# Altium PCB 28pins_PCB.PcbDoc (part 2 of 3)
Units mm, origin at the board's own origin, x right, y up, seen from the top; angles counter-clockwise.
Board outline 68.58 x 53.34 mm, 2 copper layers (L1, L2), stack 1.671 mm thick; 105 components, 73 nets, 323 pads, 83 vias.
Unrouted connection lines stored in the file: 1.
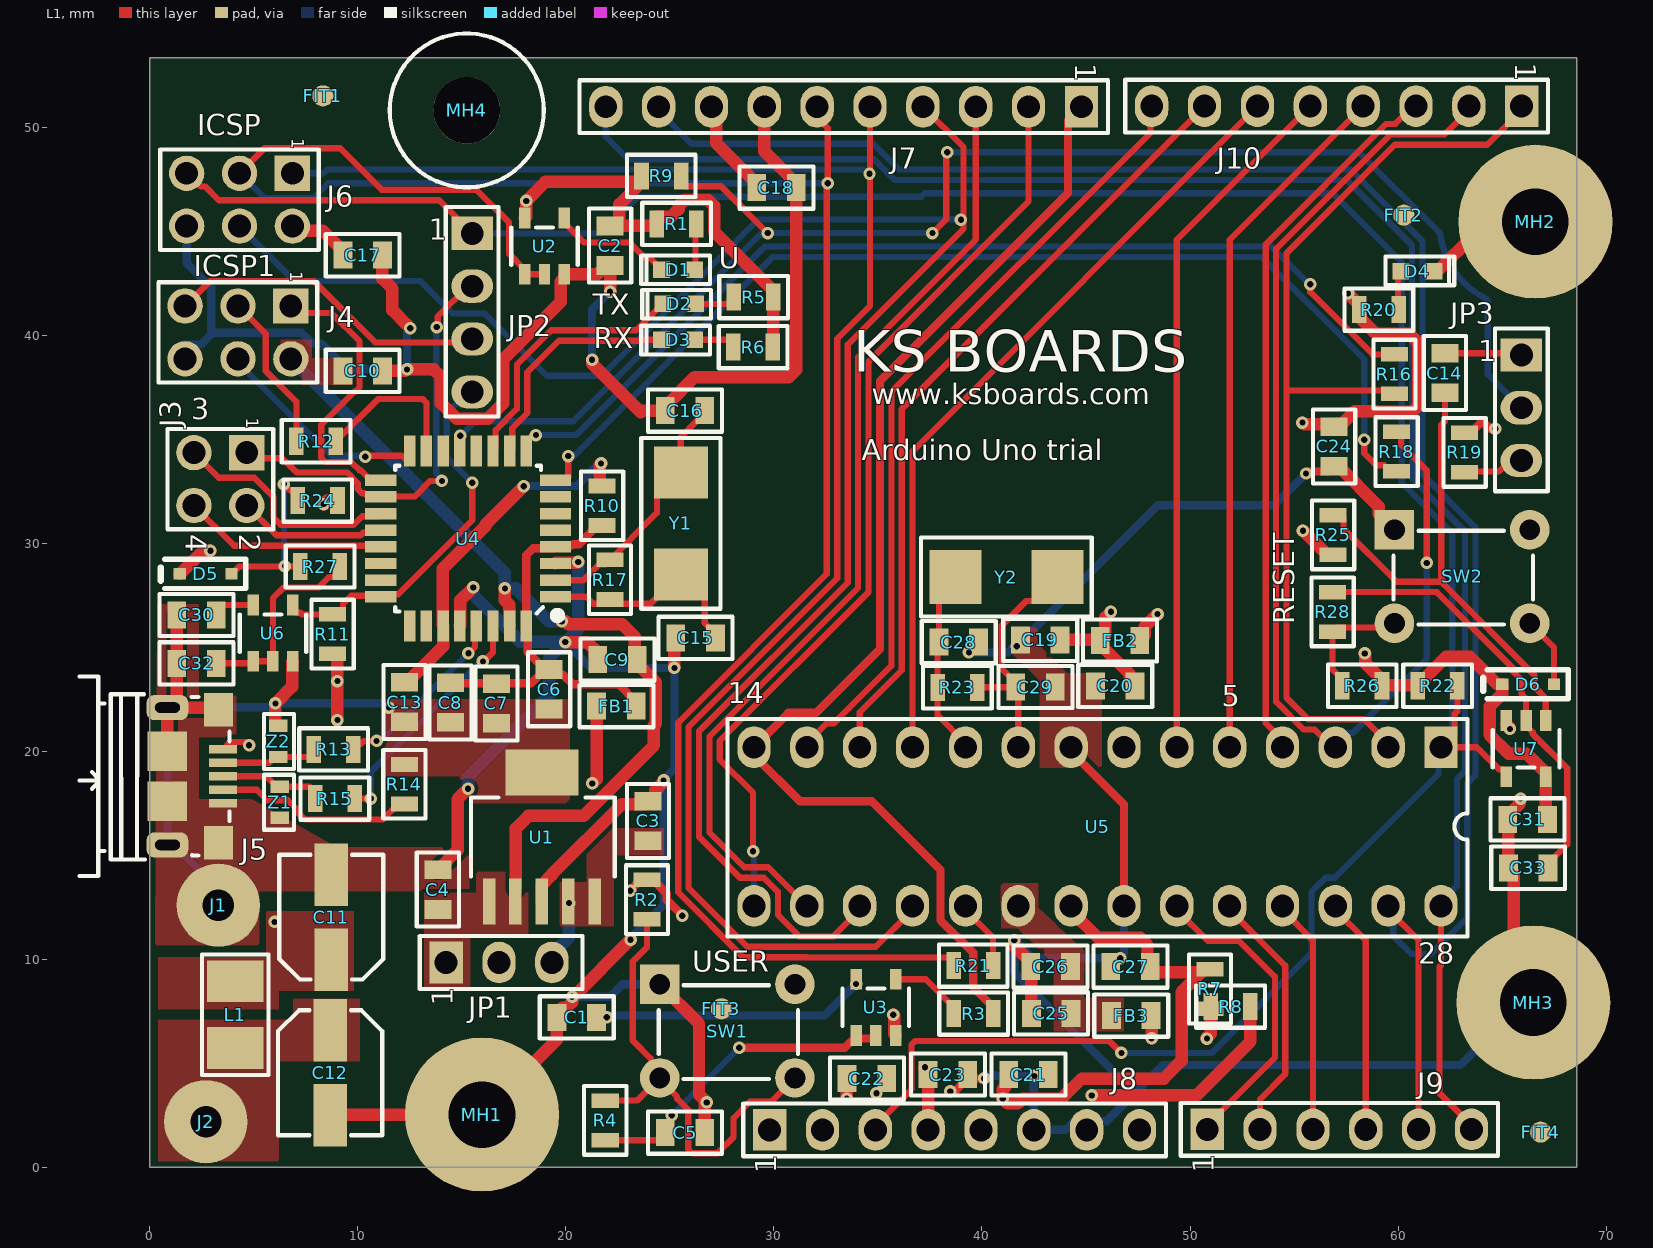
[diagram p0: L1 view]

## Part data (continued)
R2 R11 R22 R24 R25 R26: library part RC0805FR-0710KL, "RES SMD 10K OHM 1% 1/8W 0805", Case Code (Imperial)=0805, Case Code (Metric)=2012, Manufacturer=Yageo, Max Operating Temperature=155°C, Max Power Dissipation=125mW, Min Operating Temperature=-55°C, Package Quantity=1, Resistance=10kR, Resistor Type="Thick Film", Supplier Part Number 1=311-10.0KCRCT-ND, Temperature Coefficient=100ppm/°C, Tolerance=1%, Voltage Rating=150V, Case/Package=0805, Category="Chip SMD Resistors", ComponentLink1Description=https://datasheet.ciiva.com/11808/0900766b8106beab-11808151.pdf?src-supplier=RSComponents, ComponentLink1URL=https://datasheet.ciiva.com/11808/0900766b8106beab-11808151.pdf?src-supplier=RSComponents, ComponentLink2Description=https://datasheet.ciiva.com/12669/rc0805-12669688.pdf?src-supplier=Mouser, ComponentLink2URL=https://datasheet.ciiva.com/12669/rc0805-12669688.pdf?src-supplier=Mouser, ComponentLink3Description=https://datasheet.ciiva.com/46447/444164-46447563.pdf?src-supplier=Element14, ComponentLink3URL=https://datasheet.ciiva.com/46447/444164-46447563.pdf?src-supplier=Element14, ComponentLink4Description=https://datasheet.ciiva.com/2456/pyu-r-int-thick-7-2456972.pdf?src-supplier=Digi-Key, ComponentLink4URL=https://datasheet.ciiva.com/2456/pyu-r-int-thick-7-2456972.pdf?src-supplier=Digi-Key, ComponentLink5Description=https://datasheet.ciiva.com/2456/pyu-r-int-thick-7-2456973.pdf?src-supplier=Digi-Key, ComponentLink5URL=https://datasheet.ciiva.com/2456/pyu-r-int-thick-7-2456973.pdf?src-supplier=Digi-Key, ComponentLink6Description=https://datasheet.ciiva.com/2456/pyu-r-int-thick-7-2456974.pdf?src-supplier=Digi-Key, ComponentLink6URL=https://datasheet.ciiva.com/2456/pyu-r-int-thick-7-2456974.pdf?src-supplier=Digi-Key, ComponentLink7Description=https://datasheet.ciiva.com/16747/rc0805-16747087.pdf?src-supplier=Future+Electronics, ComponentLink7URL=https://datasheet.ciiva.com/16747/rc0805-16747087.pdf?src-supplier=Future+Electronics, Depth=1.25mm, Features="Moisture Resistant", Height=0.024inch, Lead Free="Lead Free", Length=2mm, Manufacturer Part Number=RC0805FR-0710KL, Military Standard=Not, Number of Terminations=2, Packaging="Tape and Reel", Power Rating=125mW, Pricing 1="1=0,10000, 10=0,03600, 100=0,01470, 1000=0,00660, 2500=0,00573 (USD)", REACH SVHC=Unknown, RoHS=Yes, Stock 1=16566844, Supplier 1=Digi-Key, Termination=SMD/SMT, Width=0.049inch
R4 R12 R13 R15 R21 R27 R28: library part RC0805FR-0722RL, "RES SMD 22 OHM 1% 1/8W 0805", Case Code (Imperial)=0805, Case Code (Metric)=2012, Manufacturer=Yageo, Max Operating Temperature=155°C, Max Power Dissipation=125mW, Min Operating Temperature=-55°C, Package Quantity=1, Resistor Type="Thick Film", Supplier Part Number 1=311-22.0CRCT-ND, Temperature Coefficient=100ppm/°C, Tolerance=1%, Voltage Rating=150V, Case/Package=0805, Category="Chip SMD Resistors", ComponentLink1Description=https://datasheet.ciiva.com/11819/0900766b8106beab-11819837.pdf?src-supplier=RSComponents, ComponentLink1URL=https://datasheet.ciiva.com/11819/0900766b8106beab-11819837.pdf?src-supplier=RSComponents, ComponentLink2Description=https://datasheet.ciiva.com/2457/pyu-r-int-thick-7-2457044.pdf?src-supplier=Digi-Key, ComponentLink2URL=https://datasheet.ciiva.com/2457/pyu-r-int-thick-7-2457044.pdf?src-supplier=Digi-Key, ComponentLink3Description=https://datasheet.ciiva.com/46447/444164-46447574.pdf?src-supplier=Element14, ComponentLink3URL=https://datasheet.ciiva.com/46447/444164-46447574.pdf?src-supplier=Element14, ComponentLink4Description=https://datasheet.ciiva.com/2457/pyu-r-int-thick-7-2457045.pdf?src-supplier=Digi-Key, ComponentLink4URL=https://datasheet.ciiva.com/2457/pyu-r-int-thick-7-2457045.pdf?src-supplier=Digi-Key, ComponentLink5Description=https://datasheet.ciiva.com/2457/pyu-r-int-thick-7-2457046.pdf?src-supplier=Digi-Key, ComponentLink5URL=https://datasheet.ciiva.com/2457/pyu-r-int-thick-7-2457046.pdf?src-supplier=Digi-Key, ComponentLink6Description=https://datasheet.ciiva.com/12667/rc0805-12667371.pdf?src-supplier=Mouser, ComponentLink6URL=https://datasheet.ciiva.com/12667/rc0805-12667371.pdf?src-supplier=Mouser, Depth=1.25mm, Features="Moisture Resistant", Height=0.024inch, Lead Free="Lead Free", Length=0.079inch, Manufacturer Part Number=RC0805FR-0722RL, Military Standard=Not, Number of Terminations=2, Packaging="Tape and Reel", Power Rating=125mW, Pricing 1="1=0,10000, 10=0,03600, 100=0,01470, 1000=0,00660, 2500=0,00573 (USD)", REACH SVHC=Unknown, Resistance=22R, RoHS=Yes, Stock 1=471246, Supplier 1=Digi-Key, Termination=SMD/SMT, Width=0.049inch, Working Voltage=150V
R7 R8 R10 R14: library part RC0805JR-070RL, "Surface Mount Thick Film Resistor, RC Series, 125 mW, - 5%, 150 V, 0805 [2012 Metric]", Case Code (Imperial)=0805, Case Code (Metric)=2012, Manufacturer=Yageo, Max Operating Temperature=155°C, Min Operating Temperature=-55°C, Power Rating=125mW, Resistance=0mR, Resistor Type="Thick Film", Supplier Part Number 1=311-0.0ARCT-ND, Temperature Coefficient=200ppm/°C, Tolerance=5%, Voltage Rating=150V, Case/Package=0805, Category="Chip SMD Resistors", ComponentLink1Description=https://datasheet.ciiva.com/7941/1738694-7941861.pdf?src-supplier=Element14, ComponentLink1URL=https://datasheet.ciiva.com/7941/1738694-7941861.pdf?src-supplier=Element14, ComponentLink2Description=https://datasheet.ciiva.com/11819/0900766b8106beab-11819430.pdf?src-supplier=RSComponents, ComponentLink2URL=https://datasheet.ciiva.com/11819/0900766b8106beab-11819430.pdf?src-supplier=RSComponents, ComponentLink3Description=https://datasheet.ciiva.com/7941/1738694-7941862.pdf?src-supplier=Element14, ComponentLink3URL=https://datasheet.ciiva.com/7941/1738694-7941862.pdf?src-supplier=Element14, ComponentLink4Description=https://datasheet.ciiva.com/7941/1738694-7941863.pdf?src-supplier=Element14, ComponentLink4URL=https://datasheet.ciiva.com/7941/1738694-7941863.pdf?src-supplier=Element14, ComponentLink5Description=https://datasheet.ciiva.com/15190/getdatasheetpartid-330685-15190028.pdf?src-supplier=Verical, ComponentLink5URL=https://datasheet.ciiva.com/15190/getdatasheetpartid-330685-15190028.pdf?src-supplier=Verical, Contact Plating=Tin,Matte, Depth=1.25mm, Height=0.5mm, Lead Free="Lead Free", Length=2mm, Manufacturer Part Number=RC0805JR-070RL, Military Standard=Not, Number of Pins=2, Packaging="Tape and Reel", Pricing 1="1=0,10000, 10=0,03100, 25=0,02240, 50=0,01720, 100=0,01260, 250=0,00964, 500=0,00770, 1000=0,00567 (USD)", Radiation Hardening=No, REACH SVHC=Unknown, RoHS=Yes, Stock 1=4474861, Supplier 1=Digi-Key, Termination=SMD/SMT, Voltage Rating (DC)=150V, Width=1.25mm
R9: library part RC0805FR-07100KL, "YAGEO         RC0805FR-07100KL            RES, THICK FILM, 100K, 1%, 0.125W, 0805, REEL", Case Code (Imperial)=0805, Case Code (Metric)=2012, Manufacturer=Yageo, Max Operating Temperature=155°C, Max Power Dissipation=125mW, Min Operating Temperature=-55°C, Package Quantity=1, Resistance=100kR, Resistor Type="Thick Film", Supplier Part Number 1=311-100KCRCT-ND, Temperature Coefficient=100ppm/°C, Tolerance=1%, Voltage Rating=150V, Case/Package=0805, Category="Chip SMD Resistors", ComponentLink1Description=https://datasheet.ciiva.com/11808/0900766b8106beab-11808858.pdf?src-supplier=RSComponents, ComponentLink1URL=https://datasheet.ciiva.com/11808/0900766b8106beab-11808858.pdf?src-supplier=RSComponents, ComponentLink2Description=https://datasheet.ciiva.com/2457/pyu-r-int-thick-7-2457017.pdf?src-supplier=Digi-Key, ComponentLink2URL=https://datasheet.ciiva.com/2457/pyu-r-int-thick-7-2457017.pdf?src-supplier=Digi-Key, ComponentLink3Description=https://datasheet.ciiva.com/12667/rc0805-12667001.pdf?src-supplier=Mouser, ComponentLink3URL=https://datasheet.ciiva.com/12667/rc0805-12667001.pdf?src-supplier=Mouser, ComponentLink4Description=https://datasheet.ciiva.com/2457/pyu-r-int-thick-7-2457018.pdf?src-supplier=Digi-Key, ComponentLink4URL=https://datasheet.ciiva.com/2457/pyu-r-int-thick-7-2457018.pdf?src-supplier=Digi-Key, ComponentLink5Description=https://datasheet.ciiva.com/16747/rc0805-16747226.pdf?src-supplier=Future+Electronics, ComponentLink5URL=https://datasheet.ciiva.com/16747/rc0805-16747226.pdf?src-supplier=Future+Electronics, ComponentLink6Description=https://datasheet.ciiva.com/7941/1697719-7941678.pdf?src-supplier=Element14, ComponentLink6URL=https://datasheet.ciiva.com/7941/1697719-7941678.pdf?src-supplier=Element14, ComponentLink7Description=https://datasheet.ciiva.com/22747/444164-22747534.pdf?src-supplier=Element14, ComponentLink7URL=https://datasheet.ciiva.com/22747/444164-22747534.pdf?src-supplier=Element14, ComponentLink8Description=https://datasheet.ciiva.com/2457/pyu-r-int-thick-7-2457019.pdf?src-supplier=Digi-Key, ComponentLink8URL=https://datasheet.ciiva.com/2457/pyu-r-int-thick-7-2457019.pdf?src-supplier=Digi-Key, ComponentLink9Description=https://datasheet.ciiva.com/7660/38627-7660796.pdf?src-supplier=Element14, ComponentLink9URL=https://datasheet.ciiva.com/7660/38627-7660796.pdf?src-supplier=Element14, ComponentLink10Description=https://datasheet.ciiva.com/7941/1697719-7941676.pdf?src-supplier=Element14, ComponentLink10URL=https://datasheet.ciiva.com/7941/1697719-7941676.pdf?src-supplier=Element14, ComponentLink11Description=https://datasheet.ciiva.com/7941/1686128-7941677.pdf?src-supplier=Element14, ComponentLink11URL=https://datasheet.ciiva.com/7941/1686128-7941677.pdf?src-supplier=Element14, Depth=1.25mm, Features="Moisture Resistant", Height=0.024inch, Lead Free="Lead Free", Lead Pitch=0.4mm, Length=2mm, Manufacturer Part Number=RC0805FR-07100KL, Military Standard=Not, Number of Pins=2, Number of Terminations=2, Packaging="Tape and Reel", Power Rating=125mW, Pricing 1="1=0,10000, 10=0,03600, 100=0,01470, 1000=0,00660, 2500=0,00573 (USD)", REACH SVHC=Unknown, RoHS=Yes, Stock 1=2509974, Supplier 1=Digi-Key, Termination=SMD/SMT, Voltage Rating (DC)=150V, Width=0.049inch
R16 R18 R19: library part RC0805FR-071KL, "RESISTOR, 0805 1K 1%, FULL REEL; Product Range:YAGEO - RC Series; Resistance:1kohm; Power Rating:125mW; Resistance Tolerance:± 1%; Resistor Case Style:0805 [2012 Metric]; Resistor Element Material:Thick Film; Temperature Coefficient:± 250ppm/°C; Voltage Rating:150V; Packaging:Tape & Reel; MSL:-; SVHC:No SVHC (16-Dec-2013); External Depth:0.55mm; External Length / Height:2mm; External Width:1.25mm; No. of Pins:2; Operating Temperature Max:155°C; Operating Temperature Min:-55°C; Operating Temperature Range:-55°C to +155°C; Reel Quantity:5000; Resistor Mounting:SMD; Series:RC12H; Temperature Coef", Case Code (Imperial)=0805, Case Code (Metric)=2012, Manufacturer=Yageo, Max Operating Temperature=155°C, Max Power Dissipation=125mW, Min Operating Temperature=-55°C, Package Quantity=1, Resistance=1kR, Resistor Type="Thick Film", Supplier Part Number 1=311-1.00KCRCT-ND, Temperature Coefficient=100ppm/°C, Tolerance=1%, Voltage Rating=150V, Case/Package=0805, Category="Chip SMD Resistors", Depth=1.25mm, Features="Moisture Resistant", Height=0.024inch, Lead Free="Lead Free", Length=0.079inch, Manufacturer Part Number=RC0805FR-071KL, Military Standard=Not, Number of Pins=2, Number of Terminations=2, Packaging="Tape and Reel", Power Rating=125mW, Pricing 1="1=0,10000, 10=0,03600, 100=0,01470, 1000=0,00660, 2500=0,00573 (USD)", REACH SVHC=Unknown, RoHS=Yes, Stock 1=15292082, Supplier 1=Digi-Key, Termination=SMD/SMT, Voltage Rating (DC)=150V, Width=0.049inch
R17 R23: library part RC0805FR-071ML, "RES SMD 1M OHM 1% 1/8W 0805", Case Code (Imperial)=0805, Case Code (Metric)=2012, Manufacturer=Yageo, Max Operating Temperature=155°C, Max Power Dissipation=125mW, Min Operating Temperature=-55°C, Package Quantity=1, Resistance=1MR, Resistor Type="Thick Film", Supplier Part Number 1=311-1.00MCRCT-ND, Temperature Coefficient=100ppm/°C, Tolerance=1%, Voltage Rating=150V, Case/Package=0805, Category="Chip SMD Resistors", ComponentLink1Description=https://datasheet.ciiva.com/2519/pyu-r-int-thick-7-2519712.pdf?src-supplier=Digi-Key, ComponentLink1URL=https://datasheet.ciiva.com/2519/pyu-r-int-thick-7-2519712.pdf?src-supplier=Digi-Key, ComponentLink2Description=https://datasheet.ciiva.com/12666/rc0805-12666975.pdf?src-supplier=Mouser, ComponentLink2URL=https://datasheet.ciiva.com/12666/rc0805-12666975.pdf?src-supplier=Mouser, ComponentLink3Description=https://datasheet.ciiva.com/2519/pyu-r-int-thick-7-2519713.pdf?src-supplier=Digi-Key, ComponentLink3URL=https://datasheet.ciiva.com/2519/pyu-r-int-thick-7-2519713.pdf?src-supplier=Digi-Key, ComponentLink4Description=https://datasheet.ciiva.com/2519/pyu-r-int-thick-7-2519711.pdf?src-supplier=Digi-Key, ComponentLink4URL=https://datasheet.ciiva.com/2519/pyu-r-int-thick-7-2519711.pdf?src-supplier=Digi-Key, ComponentLink5Description=https://datasheet.ciiva.com/17419/rc0805-17419909.pdf?src-supplier=Future+Electronics, ComponentLink5URL=https://datasheet.ciiva.com/17419/rc0805-17419909.pdf?src-supplier=Future+Electronics, Depth=1.25mm, Features="Moisture Resistant", Height=0.024inch, Lead Free="Lead Free", Length=0.079inch, Manufacturer Part Number=RC0805FR-071ML, Military Standard=Not, Number of Terminations=2, Packaging="Tape and Reel", Power Rating=125mW, Pricing 1="1=0,100000, 10=0,036000, 100=0,014800, 1000=0,006650, 2500=0,005770 (USD)", REACH SVHC=Unknown, RoHS=Yes, Stock 1=2768308, Supplier 1=Digi-Key, Termination=SMD/SMT, Width=0.049inch
SW1 SW2: "SWITCH TACTILE SPST-NO 0.05A 24V", Contact Current Rating=50mA, Contact Resistance=100mR, Manufacturer="TE Connectivity Alcoswitch", Max Operating Temperature=85°C, Max Voltage Rating (DC)=24V, Min Operating Temperature=-35°C, Operating Force=160gf, Package Quantity=750, Supplier Part Number 1=450-1650-ND, Actuator Length=0.055inch, Actuator Material=PBT, Actuator Type=Standard, Category="Pushbutton Switches", ComponentLink1Description=https://datasheet.ciiva.com/30199/1825910-6rqpn1825910-6-30199520.pdf?src-supplier=Onlinecomponents.com, ComponentLink1URL=https://datasheet.ciiva.com/30199/1825910-6rqpn1825910-6-30199520.pdf?src-supplier=Onlinecomponents.com, ComponentLink2Description=https://datasheet.ciiva.com/15184/getdatasheetpartid-395915-15184509.pdf?src-supplier=Verical, ComponentLink2URL=https://datasheet.ciiva.com/15184/getdatasheetpartid-395915-15184509.pdf?src-supplier=Verical, Contact Material="Copper Alloy", Contact Plating=Silver, Electrical Life=100000Cycles, ELV=Compliant, Illumination Type=Non-Illuminated,Illuminated, Lead Free="Lead Free", Length=5.99mm, Manufacturer Part Number=1825910-6, Max Current Rating=50mA, Mechanical Life=100000Cycles, Mount="Through Hole", Orientation=Straight, Packaging="Loose Piece", Pricing 1="1=0,10000, 10=0,10100, 25=0,09560, 100=0,08700, 250=0,08180, 500=0,07484, 1000=0,06265, 5000=0,05743, 10000=0,05395 (USD)", REACH SVHC=Unknown, RoHS=Yes, Stock 1=151652, Supplier 1=Digi-Key, Switch Function=Off-Mom, Switch Travel=0.25mm, Termination="PC Pins", Throw Configuration=SPST, Type=Switch
U1: "IC REG LINEAR 3.3V 1.5A SOT223-6", Case/Package=SOT-223, Dropout Voltage=340mV, Input Bias Current=1mA, Manufacturer="Texas Instruments", Max Input Voltage=20V, Max Operating Temperature=125°C, Max Output Current=1.5A, Max Output Voltage=3.3V, Min Current Limit=1.6A, Min Input Voltage=2.1V, Min Operating Temperature=-40°C, Package Quantity=1, Supplier Part Number 1=296-24534-1-ND, Accuracy=3%, Category="Voltage Regulators - Linear", ComponentLink1Description=https://datasheet.ciiva.com/2046/tl1963a-2046161.pdf?src-supplier=Digi-Key, ComponentLink1URL=https://datasheet.ciiva.com/2046/tl1963a-2046161.pdf?src-supplier=Digi-Key, ComponentLink2Description=https://datasheet.ciiva.com/2046/tl1963a-2046162.pdf?src-supplier=Digi-Key, ComponentLink2URL=https://datasheet.ciiva.com/2046/tl1963a-2046162.pdf?src-supplier=Digi-Key, ComponentLink3Description=https://datasheet.ciiva.com/2046/tl1963a-2046163.pdf?src-supplier=Digi-Key, ComponentLink3URL=https://datasheet.ciiva.com/2046/tl1963a-2046163.pdf?src-supplier=Digi-Key, ComponentLink4Description=https://datasheet.ciiva.com/26176/tl1963a-25-26176569.pdf?src-supplier=Avnet+Europe, ComponentLink4URL=https://datasheet.ciiva.com/26176/tl1963a-25-26176569.pdf?src-supplier=Avnet+Europe, Contact Plating=Gold, Lead Free="Lead Free", Manufacturer Part Number=TL1963A-33DCQR, Min Output Voltage=3.3V, Number of Outputs=1, Number of Pins=6, Number of Regulators=1, Output Current=1.5A, Output Type=Fixed, Output Voltage=3.3V, Packaging="Tape and Reel", Polarity=Positive, Pricing 1="1=2,80000, 10=2,51300, 25=2,37600, 100=1,95360, 250=1,75296, 500=1,68960, 1000=1,40448 (USD)", Quiescent Current=1mA, Radiation Hardening=No, RoHS=Yes, Stock 1=1766, Supplier 1=Digi-Key
U2 U3 U6 U7: "TEXAS INSTRUMENTS - SN74AHC1G09DBVR - AND Gate, 74AHC1G09, 2 Input, 2 V to 5.5 V, SOT-23-5", Case/Package=SOT-23, Low Level Output Current=8mA, Manufacturer="Texas Instruments", Max Operating Temperature=125°C, Max Supply Voltage=5.5V, Min Operating Temperature=-55°C, Min Supply Voltage=2V, Output Current=25mA, Package Quantity=3000, Quiescent Current=1uA, Supplier Part Number 1=296-29202-1-ND, Category="Logic Gates", ComponentLink1Description=https://datasheet.ciiva.com/1864/sn74ahc1g09-1864410.pdf?src-supplier=Digi-Key, ComponentLink1URL=https://datasheet.ciiva.com/1864/sn74ahc1g09-1864410.pdf?src-supplier=Digi-Key, ComponentLink2Description=https://datasheet.ciiva.com/1864/sn74ahc1g09-1864411.pdf?src-supplier=Digi-Key, ComponentLink2URL=https://datasheet.ciiva.com/1864/sn74ahc1g09-1864411.pdf?src-supplier=Digi-Key, ComponentLink3Description=https://datasheet.ciiva.com/1864/sn74ahc1g09-1864412.pdf?src-supplier=Digi-Key, ComponentLink3URL=https://datasheet.ciiva.com/1864/sn74ahc1g09-1864412.pdf?src-supplier=Digi-Key, Contact Plating=Tin,Matte, Lead Free="Lead Free", Logic Function="AND GATE", Manufacturer Part Number=SN74AHC1G09DBVR, Mount="Surface Mount", Number of Bits=1, Number of Circuits=1, Number of Elements=1, Number of Gates=1, Number of Inputs=2, Number of Outputs=1, Number of Pins=5, Output Voltage=5.5V, Packaging="Tape and Reel", Pricing 1="1=0,32000, 10=0,24000, 25=0,21000, 100=0,13590, 250=0,11252, 500=0,09000, 1000=0,06900 (USD)", Propagation Delay=7.5ns, Radiation Hardening=No, REACH SVHC="No SVHC", RoHS=Yes, Stock 1=19058, Supplier 1=Digi-Key
U4: "MICROCHIP - ATMEGA16U2-AU - MCU, 8BIT, MEGAAVR, 16MHZ, TQFP-32", Case/Package=A, Frequency=16MHz, Manufacturer="Microchip / Atmel", Max Operating Temperature=85°C, Max Supply Voltage=5.5V, Min Operating Temperature=-40°C, Min Supply Voltage=2.7V, Package Quantity=1250, Supplier Part Number 1=ATMEGA16U2-AU-ND, Category=Microcontrollers, ComponentLink1Description=https://datasheet.ciiva.com/13036/doc7799-28769-13036800.pdf?src-supplier=Mouser, ComponentLink1URL=https://datasheet.ciiva.com/13036/doc7799-28769-13036800.pdf?src-supplier=Mouser, ComponentLink2Description=https://datasheet.ciiva.com/22651/doc7799-22651110.pdf?src-supplier=Farnell, ComponentLink2URL=https://datasheet.ciiva.com/22651/doc7799-22651110.pdf?src-supplier=Farnell, Contact Plating=Tin,Matte, Core Architecture=AVR, Data Bus Width=8b, Height=1.05mm, Interface=SPI,UART,USB,USART,Serial, Lead Free="Lead Free", Length=7mm, Manufacturer Part Number=ATMEGA16U2-AU, Max Frequency=16MHz, Memory Size=16KB, Memory Type=FLASH, Mount="Surface Mount", Number of I/Os=22, Number of Pins=32, Number of Programmable I/O=22, Number of PWM Channels=5, Number of SPI Channels=1, Number of Timers/Counters=2, Oscillator Type=Internal, Packaging=Tray, Peripherals="Brown-out Detect/Reset,POR,PWM,WDT", Pricing 1="1=2,45000, 25=2,25000, 100=2,04000 (USD)", RAM Size=512B, REACH SVHC="No SVHC", RoHS=Yes, Stock 1=3559, Supplier 1=Digi-Key, Watchdog Timer=Yes, Width=7mm
U5: "ATMEGA328P-PU; 8 bit Microcontroller AVR 20MHz 1; 32kb Flash; 2kb RAM; I2C SPI 2", Case/Package=PDIP, Frequency=20MHz, Manufacturer="Microchip / Atmel", Max Operating Temperature=85°C, Max Supply Voltage=5.5V, Min Operating Temperature=-40°C, Min Supply Voltage=1.8V, Package Quantity=14, Supplier Part Number 1=ATMEGA328P-PU-ND, Category=Microcontrollers, ComponentLink1Description=https://datasheet.ciiva.com/1157/1684409-1157696.pdf?src-supplier=Element14, ComponentLink1URL=https://datasheet.ciiva.com/1157/1684409-1157696.pdf?src-supplier=Element14, ComponentLink2Description=https://datasheet.ciiva.com/20168/73-4283-20168380.pdf?src-supplier=Rapid+Electronics, ComponentLink2URL=https://datasheet.ciiva.com/20168/73-4283-20168380.pdf?src-supplier=Rapid+Electronics, ComponentLink3Description=https://datasheet.ciiva.com/19457/2139111-19457070.pdf?src-supplier=Jameco, ComponentLink3URL=https://datasheet.ciiva.com/19457/2139111-19457070.pdf?src-supplier=Jameco, ComponentLink4Description=https://datasheet.ciiva.com/26818/atmega328p-pu-26818578.pdf?src-supplier=IIIC, ComponentLink4URL=https://datasheet.ciiva.com/26818/atmega328p-pu-26818578.pdf?src-supplier=IIIC, ComponentLink5Description=https://datasheet.ciiva.com/29119/155197-da-01-en-microcontr-atmega328p-pu-8bit-pdip-28-29119593.pdf?src-supplier=Conrad, ComponentLink5URL=https://datasheet.ciiva.com/29119/155197-da-01-en-microcontr-atmega328p-pu-8bit-pdip-28-29119593.pdf?src-supplier=Conrad, ComponentLink6Description=https://datasheet.ciiva.com/15213/getdatasheetpartid-318533-15213133.pdf?src-supplier=Verical, ComponentLink6URL=https://datasheet.ciiva.com/15213/getdatasheetpartid-318533-15213133.pdf?src-supplier=Verical, Contact Plating=Tin,Matte, Core Architecture=AVR, Data Bus Width=8b, Height=3.28mm, Interface=I2C,SPI,UART,USART,2-Wire, Lead Free="Lead Free", Length=37.4mm, Manufacturer Part Number=ATMEGA328P-PU, Max Frequency=20MHz, Memory Size=32KB, Memory Type=FLASH, Mount="Through Hole", Number of ADC Channels=6, Number of I2C Channels=1, Number of I/Os=23, Number of Pins=28, Number of Programmable I/O=23, Number of PWM Channels=6, Number of SPI Channels=1, Number of Timers/Counters=3, Oscillator Type=Internal, Packaging=Rail/Tube, Peripherals="Brown-out Detect/Reset,POR,PWM,WDT", Pricing 1="1=2,08000, 25=1,91000, 100=1,73000 (USD)", Radiation Hardening=No, RAM Size=2KB, REACH SVHC="No SVHC", RoHS=Yes, Stock 1=7026, Supplier 1=Digi-Key, Watchdog Timer=Yes, Width=6.76mm
Y1 Y2: "CRYSTAL 16.0000MHZ 18PF SMD", Case/Package=CSMD, ESR (Equivalent Series Resistance)=50R, Frequency=16MHz, Frequency Stability=30ppm, Frequency Tolerance=20ppm, Load Capacitance=18pF, Manufacturer=Abracon, Max Operating Temperature=85°C, Min Operating Temperature=-40°C, Package Quantity=1000, Resistor Type=Ceramic, Supplier Part Number 1=535-9840-1-ND, Category=Crystals, ComponentLink1Description=https://datasheet.ciiva.com/15116/getdatasheetpartid-721624-15116835.pdf?src-supplier=Verical, ComponentLink1URL=https://datasheet.ciiva.com/15116/getdatasheetpartid-721624-15116835.pdf?src-supplier=Verical, ComponentLink2Description=https://datasheet.ciiva.com/22658/947971-22658293.pdf?src-supplier=Element14, ComponentLink2URL=https://datasheet.ciiva.com/22658/947971-22658293.pdf?src-supplier=Element14, ComponentLink3Description=https://datasheet.ciiva.com/5788/abm7-5788054.pdf?src-supplier=Farnell, ComponentLink3URL=https://datasheet.ciiva.com/5788/abm7-5788054.pdf?src-supplier=Farnell, ComponentLink4Description=https://datasheet.ciiva.com/7998/947971-7998600.pdf?src-supplier=Element14, ComponentLink4URL=https://datasheet.ciiva.com/7998/947971-7998600.pdf?src-supplier=Element14, ComponentLink5Description=https://datasheet.ciiva.com/46385/947971-46385243.pdf?src-supplier=Element14, ComponentLink5URL=https://datasheet.ciiva.com/46385/947971-46385243.pdf?src-supplier=Element14, ComponentLink6Description=https://datasheet.ciiva.com/16383/abm7-16383174.pdf?src-supplier=Future+Electronics, ComponentLink6URL=https://datasheet.ciiva.com/16383/abm7-16383174.pdf?src-supplier=Future+Electronics, ComponentLink7Description=https://datasheet.ciiva.com/18649/abm7-18649865.pdf?src-supplier=Digi-Key, ComponentLink7URL=https://datasheet.ciiva.com/18649/abm7-18649865.pdf?src-supplier=Digi-Key, ComponentLink8Description=https://datasheet.ciiva.com/18649/abm7-18649866.pdf?src-supplier=Digi-Key, ComponentLink8URL=https://datasheet.ciiva.com/18649/abm7-18649866.pdf?src-supplier=Digi-Key, ComponentLink9Description=https://datasheet.ciiva.com/18649/abm7-18649867.pdf?src-supplier=Digi-Key, ComponentLink9URL=https://datasheet.ciiva.com/18649/abm7-18649867.pdf?src-supplier=Digi-Key, ComponentLink10Description=https://datasheet.ciiva.com/26941/getdatasheetpartid-719818-26941724.pdf?src-supplier=Verical, ComponentLink10URL=https://datasheet.ciiva.com/26941/getdatasheetpartid-719818-26941724.pdf?src-supplier=Verical, Depth=3.5mm, Height=0.055inch, Lead Free="Lead Free", Length=6mm, Manufacturer Part Number=ABM7-16.000MHZ-D2Y-T, Mount="Surface Mount", Number of Pins=2, Packaging="Tape and Reel", Pricing 1="1=0,87000, 10=0,77300, 50=0,72240, 100=0,63840, 500=0,60480 (USD)", Radiation Hardening=No, REACH SVHC=Unknown, RoHS=Yes, Stock 1=57628, Supplier 1=Digi-Key, Termination=SMD/SMT, Tolerance=20ppm, Width=3.3mm
Z1 Z2: "VARISTOR 0603", Capacitance=0.5pF, Case Code (Imperial)=0603, Case Code (Metric)=1608, Clamping Voltage=20V, Current Rating=50nA, Manufacturer=Bourns, Max Operating Temperature=85°C, Max Voltage Rating (DC)=5V, Min Operating Temperature=-40°C, Package Quantity=1, Supplier Part Number 1=CG0603MLC-05ECT-ND, Voltage Rating (AC)=8V, Case/Package=0603, Category=Varistors, ComponentLink1Description=https://datasheet.ciiva.com/27747/1163231-27747629.pdf?src-supplier=Jameco, ComponentLink1URL=https://datasheet.ciiva.com/27747/1163231-27747629.pdf?src-supplier=Jameco, ComponentLink2Description=https://datasheet.ciiva.com/30070/mlc-30070503.pdf?src-supplier=Onlinecomponents.com, ComponentLink2URL=https://datasheet.ciiva.com/30070/mlc-30070503.pdf?src-supplier=Onlinecomponents.com, ComponentLink3Description=https://datasheet.ciiva.com/6991/mlc-6991832.pdf?src-supplier=Digi-Key, ComponentLink3URL=https://datasheet.ciiva.com/6991/mlc-6991832.pdf?src-supplier=Digi-Key, ComponentLink4Description=https://datasheet.ciiva.com/6991/mlc-6991834.pdf?src-supplier=Digi-Key, ComponentLink4URL=https://datasheet.ciiva.com/6991/mlc-6991834.pdf?src-supplier=Digi-Key, ComponentLink5Description=https://datasheet.ciiva.com/6991/mlc-6991836.pdf?src-supplier=Digi-Key, ComponentLink5URL=https://datasheet.ciiva.com/6991/mlc-6991836.pdf?src-supplier=Digi-Key, ComponentLink6Description=https://datasheet.ciiva.com/1278/1785244-1278701.pdf?src-supplier=Element14, ComponentLink6URL=https://datasheet.ciiva.com/1278/1785244-1278701.pdf?src-supplier=Element14, ComponentLink7Description=https://datasheet.ciiva.com/22696/1785244-22696318.pdf?src-supplier=Element14, ComponentLink7URL=https://datasheet.ciiva.com/22696/1785244-22696318.pdf?src-supplier=Element14, ComponentLink8Description=https://datasheet.ciiva.com/25958/mlc-25958222.pdf?src-supplier=Avnet+Europe, ComponentLink8URL=https://datasheet.ciiva.com/25958/mlc-25958222.pdf?src-supplier=Avnet+Europe, ComponentLink9Description=https://datasheet.ciiva.com/8084/mlc-8084047.pdf?src-supplier=Avnet, ComponentLink9URL=https://datasheet.ciiva.com/8084/mlc-8084047.pdf?src-supplier=Avnet, Contact Plating=Tin, Depth=0.8mm, Element Configuration=Single, Leakage Current=50nA, Length=1.6mm, Manufacturer Part Number=CG0603MLC-05E, Number of Channels=1, Number of Circuits=1, Number of Pins=2, Operating Supply Voltage=5V, Packaging="Tape and Reel", Pricing 1="1=0,49000, 10=0,34800, 25=0,28600, 100=0,22880, 250=0,16640, 500=0,13520, 1000=0,10400, 2500=0,09360 (USD)", Radiation Hardening=No, REACH SVHC="No SVHC", RoHS=Yes, Stock 1=117918, Supplier 1=Digi-Key, Termination=SMD/SMT, Thickness=0.8mm, Turn-On Delay Time=1ns, Voltage=5V, Voltage Rating (DC)=5V, Width=0.8mm, Working Voltage=5V

## Via types
v1: diameter 0.6, hole 0.3, L1 to L2, 83 vias

## Nets (pads, with @x,y where several pads share a name; then routed paths per layer and width w, separated by ;. In a path a pad name is that pad's centre, name@x,y a point inside that pad or via, vN(x,y) a via of type N, cw(c..) or ccw(c..) an arc to the next point about the centre after c; other vN are vias at no path point)
5V_USB: C11.1 J5.1 L1.1 | length 1.5
  L1 w0.3: J5.1@3.53,20.1 3.88,20.45 4.62,20.45 v1(4.775,20.295)
  other v1: 6,11.8
16U2_16MHz_XTAL1: C15.2 R17.2 U4.1 Y1.2 | length 10.5
  L1 w0.3: U4.1@19.5,27.425 20.982,27.425 21.315,27.092 21.615,27.092 24.07,27.092 25.477,28.499 Y1.2@25.527,28.499 25.577,28.499 26.677,27.399 26.677,26.162 27.188,25.651 C15.2@27.188,25.451
16U2_16MHz_XTAL2: C16.2 R17.1 U4.2 Y1.1 | length 12.2
  L1 w0.3: U4.2@19.5,28.225 20.849,28.225 21.615,28.992 21.915,28.992 24.377,31.453 24.377,32.299 25.477,33.399 Y1.1@25.527,33.399 25.527,35.099 26.301,35.873 26.38,35.873 26.68,36.173 C16.2@26.68,36.373
16U2_RXD: R18.1 U4.8 | length 52.4
  L1 w0.3: U4.8@19.5,33.025 19.975,33.025 20.117,33.167 v1(20.117,34.188) ; v1(58.375,34.975) 58.375,34.325 58.955,33.745 59.33,33.745 59.625,33.45 R18.1@59.925,33.45
  L2 w0.3: v1(20.117,34.188) 20.371,34.188 29.938,43.755 53.451,43.755 58.375,38.831 v1(58.375,34.975)
16U2_TXD: R16.1 U4.9 | length 48.5
  L1 w0.3: U4.9@18.1,34.425 18.1,34.9 18.481,35.281 v1(18.562,35.2) ; v1(55.778,42.443) 55.778,42.077 57.63,40.225 58.78,39.075 R16.1@59.825,39.075
  L2 w0.3: v1(18.562,35.2) 20.493,35.2 29.549,44.255 53.916,44.255 55.728,42.443 v1(55.778,42.443)
16U2PROG_328P_RESETn: JP3.2 R9.1 U4.13 | length 72.2
  L1 w0.3: U4.13@14.9,34.425 14.913,34.438 14.913,35.158 v1(14.925,35.17) ; R9.1@25.537,47.65 25.537,47.35 25.737,47.15 27.456,47.15 v1(29.702,44.905) ; v1(37.617,44.905) 38.278,45.566 38.278,48.743 v1(38.329,48.793)
  L2 w0.3: v1(14.925,35.17) 14.941,35.17 15.566,35.795 15.765,35.795 15.835,35.865 20.365,35.865 29.348,44.848 29.644,44.848 v1(29.702,44.905) ; v1@29.84,44.905 v1(37.617,44.905) ; v1(38.329,48.793) 58.115,48.793 61.947,44.961 62.019,44.889 ccw(c66.04,45.374) 64.192,41.77 64.224,41.738 cw(c64.013,41.525) 64.226,41.737 64.313,41.65 64.313,38.122 JP3.2@65.925,36.51
16U_BUF_RESETn: C32.2 R27.2 U6.1 U6.2 | length 9.8
  L1 w0.3: C32.2@3.2,24.225 4.875,24.225 U6.1@4.975,24.325 U6.2@5.925,24.325 5.925,27.345 6.455,27.875 8.134,27.875 8.639,28.38 8.939,28.38 9.139,28.58 R27.2@9.139,28.88
16U_HDR_RESETn: J4.5 JP2.3 | length 15.6
  L1 w0.3: J4.5@1.702,41.402 2.902,42.602 7.893,42.602 10.846,39.649 15.339,39.649 JP2.3@15.5,39.81
16U_MISO: J4.1 U4.17 | length 13.7
  L1 w0.3: J4.1@6.782,41.402 7.119,41.065 8.723,41.065 10.086,39.702 10.086,37.483 9.881,37.278 9.834,37.278 8.251,35.695 8.251,34.569 8.251,34.105 8.456,33.9 8.921,33.9 9.694,33.9 10.087,33.506 10.144,33.506 10.625,33.025 U4.17@11.1,33.025
16U_MOSI: J4.4 U4.16 | length 9.9
  L1 w0.3: v1(10.356,34.156) 10.4,34.2 12.109,34.2 12.375,33.934 12.5,34.059 U4.16@12.5,34.425
  L2 w0.3: 4.826,38.1 8.726,34.2 10.312,34.2 v1(10.356,34.156)
16U_PB4: J3.1 JP2.2 U4.18 | length 21
  L1 w0.3: J3.1@4.665,34.35 4.928,34.087 6.369,34.087 7.056,33.4 9.486,33.4 10,32.886 10,32.605 10.205,32.4 10.324,32.4 10.374,32.35 10.975,32.35 U4.18@11.1,32.225 11.116,32.242 12.734,32.242 13.487,32.995 v1(14.046,32.995) ; v1(13.792,40.386) 13.85,40.443 13.85,40.9 15.3,42.35 JP2.2@15.5,42.35
  L2 w0.3: v1(13.792,40.386) 13.775,40.369 13.775,33.347 14.046,33.076 v1(14.046,32.995)
16U_PB5: J3.3 U4.19 | length 11.2
  L1 w0.3: J3.3@2.125,34.35 3.325,33.15 5.022,33.15 5.955,32.218 5.955,31.228 6.302,30.88 9.798,30.88 10.218,31.3 10.975,31.3 U4.19@11.1,31.425
16U_PB6: J3.2 U4.20 | length 7.1
  L1 w0.3: J3.2@4.665,31.81 6.095,30.38 10.135,30.38 10.255,30.5 10.975,30.5 U4.20@11.1,30.625
16U_PB7: J3.4 U4.21 | length 9.8
  L1 w0.3: J3.4@2.125,31.81 4.055,29.88 11.045,29.88 U4.21@11.1,29.825
16U_RESETn: JP2.4 R11.2 U4.24 U6.4 | length 18.3
  L1 w0.3: U6.4@6.875,27.025 6.875,26.8 7,26.675 7.225,26.675 7.321,26.579 9.088,26.579 9.288,26.779 9.288,27.079 9.685,27.475 11.05,27.475 U4.24@11.1,27.425 11.225,27.55 11.945,27.55 15.5,31.105 v1(15.5,32.9)
  L2 w0.3: v1(15.5,32.9) 14.275,34.125 14.275,36.245 15.3,37.27 JP2.4@15.5,37.27
16U_RX_LED: D3.1 U4.10 | length 11.2
  L1 w0.3: U4.10@17.3,34.425 17.425,34.55 17.425,35.53 18.15,36.255 18.15,38.216 19.668,39.734 23.591,39.734 23.632,39.775 D3.1@24.6,39.775
16U_SCLK: J4.3 R12.2 | length 7.7
  L1 w0.3: J4.3@4.242,41.402 5.582,40.062 5.582,38.276 7.051,36.807 R12.2@7.051,34.9